# Altium PCB 800U R3N3 IB_LED_V1.0.PcbDoc
Units mm, origin at the board's own origin, x right, y up, seen from the top; angles counter-clockwise.
Board outline 308.48 x 220.22 mm, 4 copper layers (Top Layer, Mid-Layer 2, GND, Bottom Layer); 96 components, 68 nets, 257 pads, 105 vias.
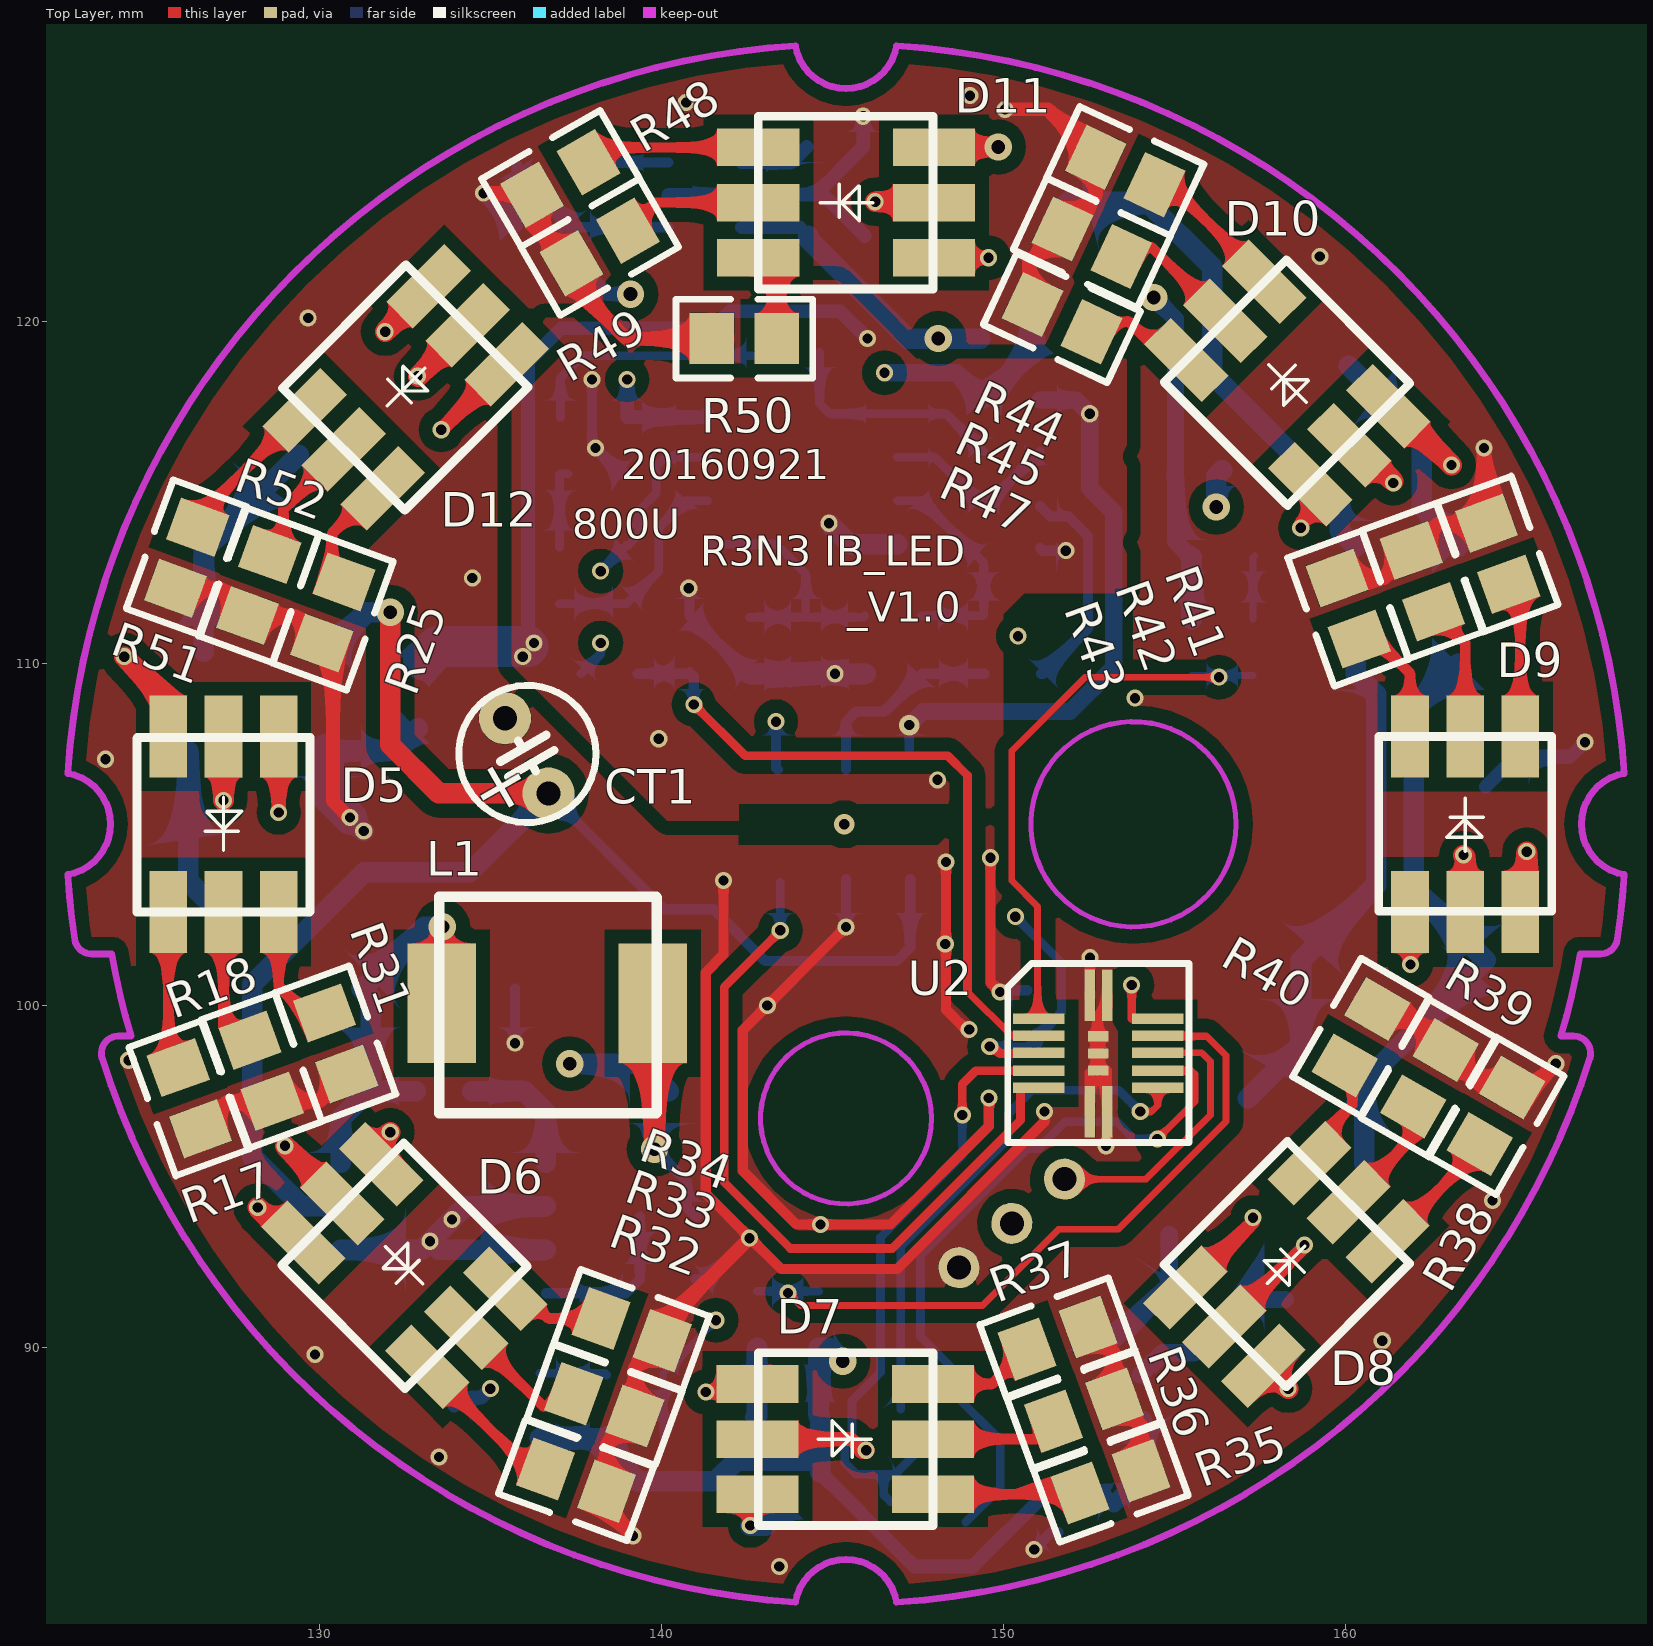
[diagram p0: Top Layer view]
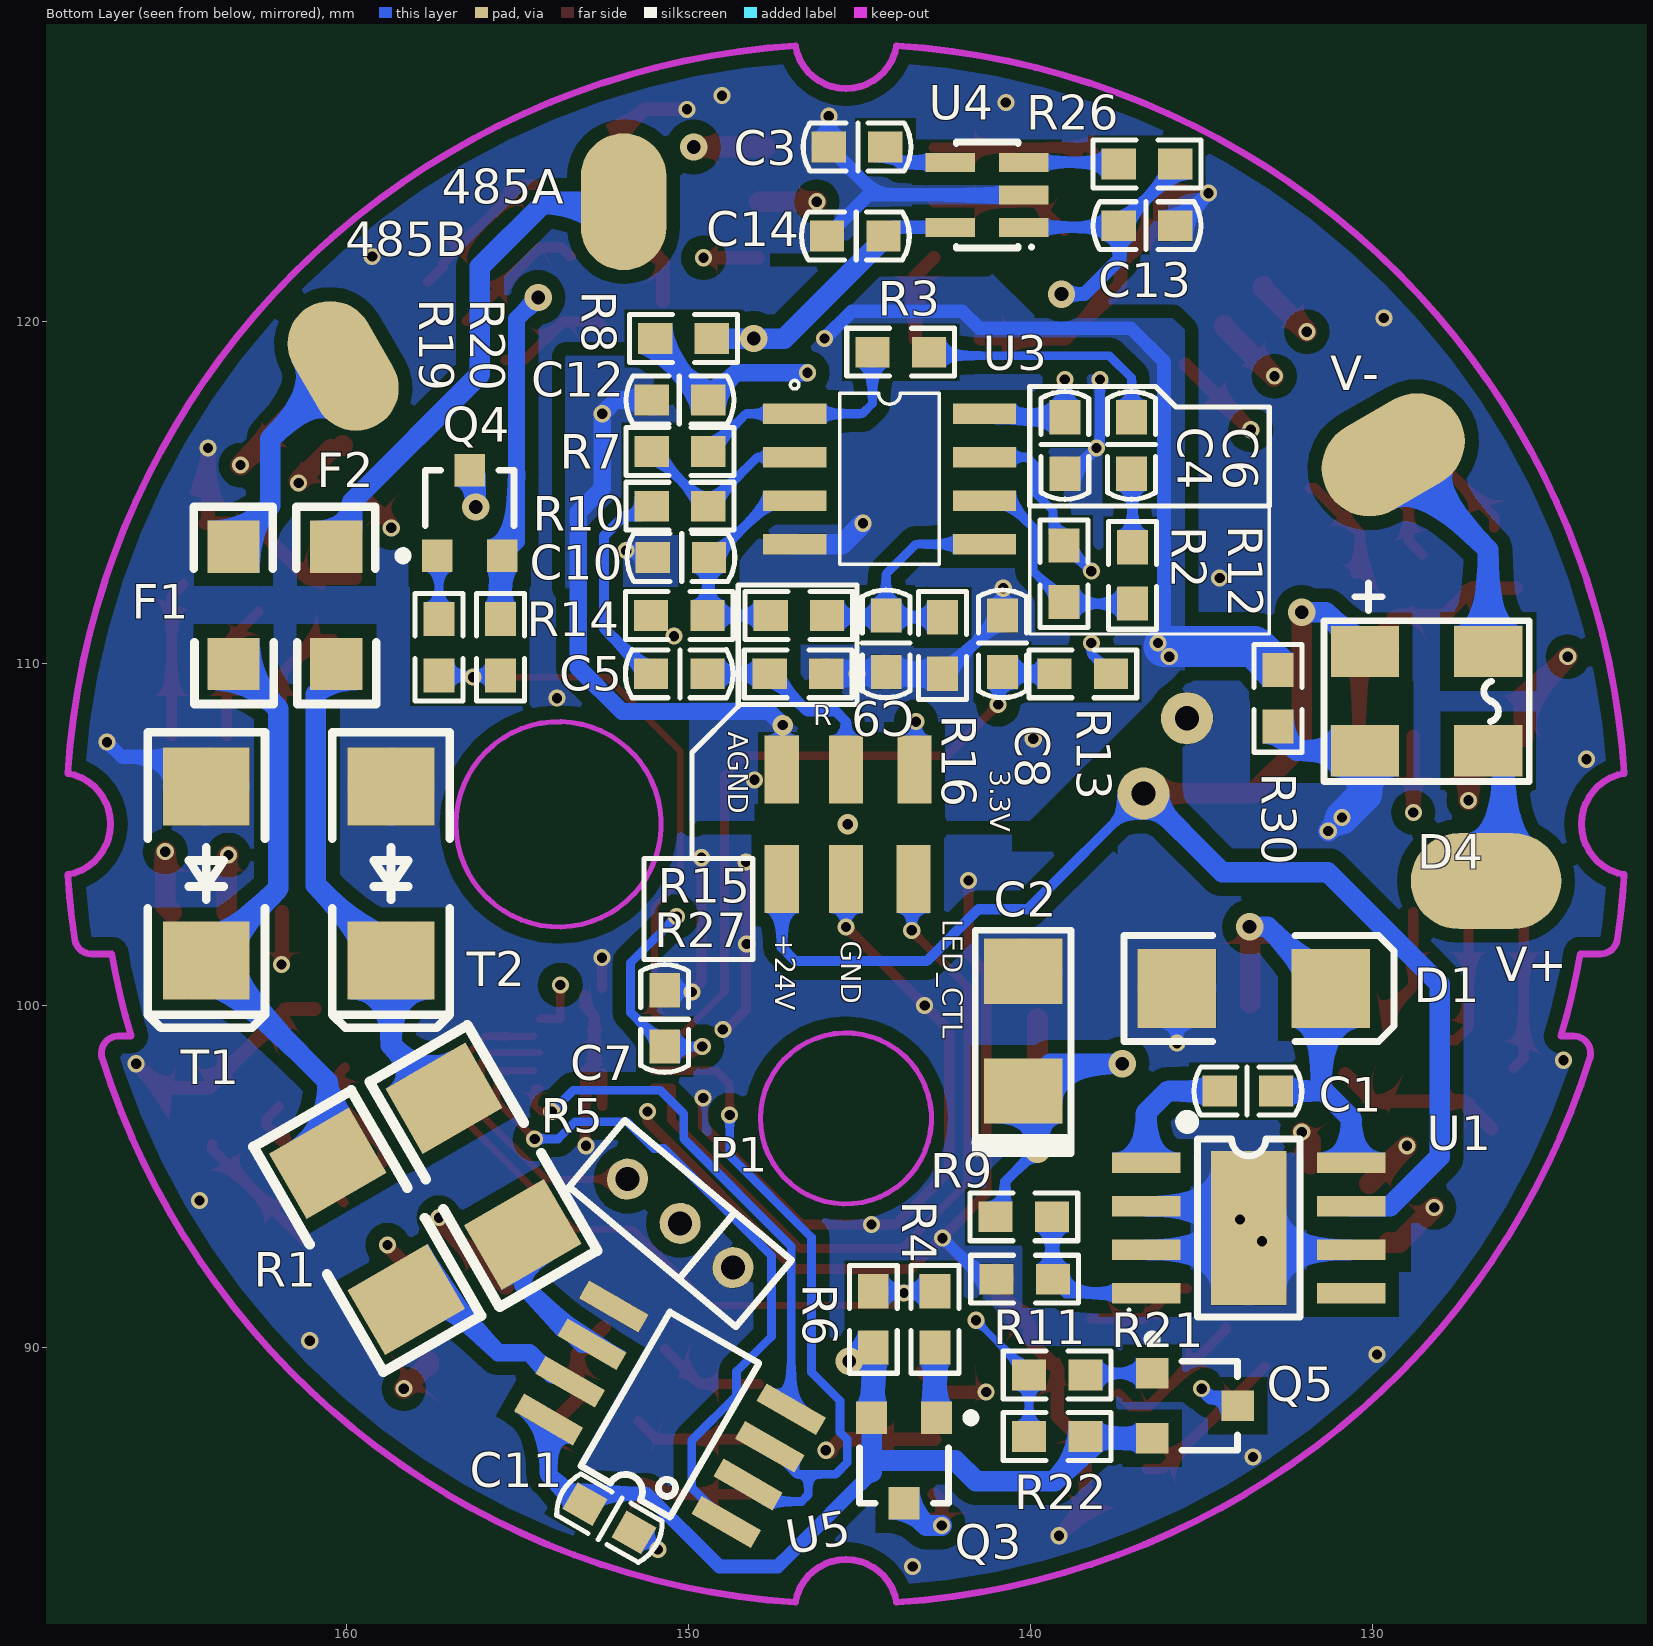
[diagram p1: Bottom Layer view, seen from below]
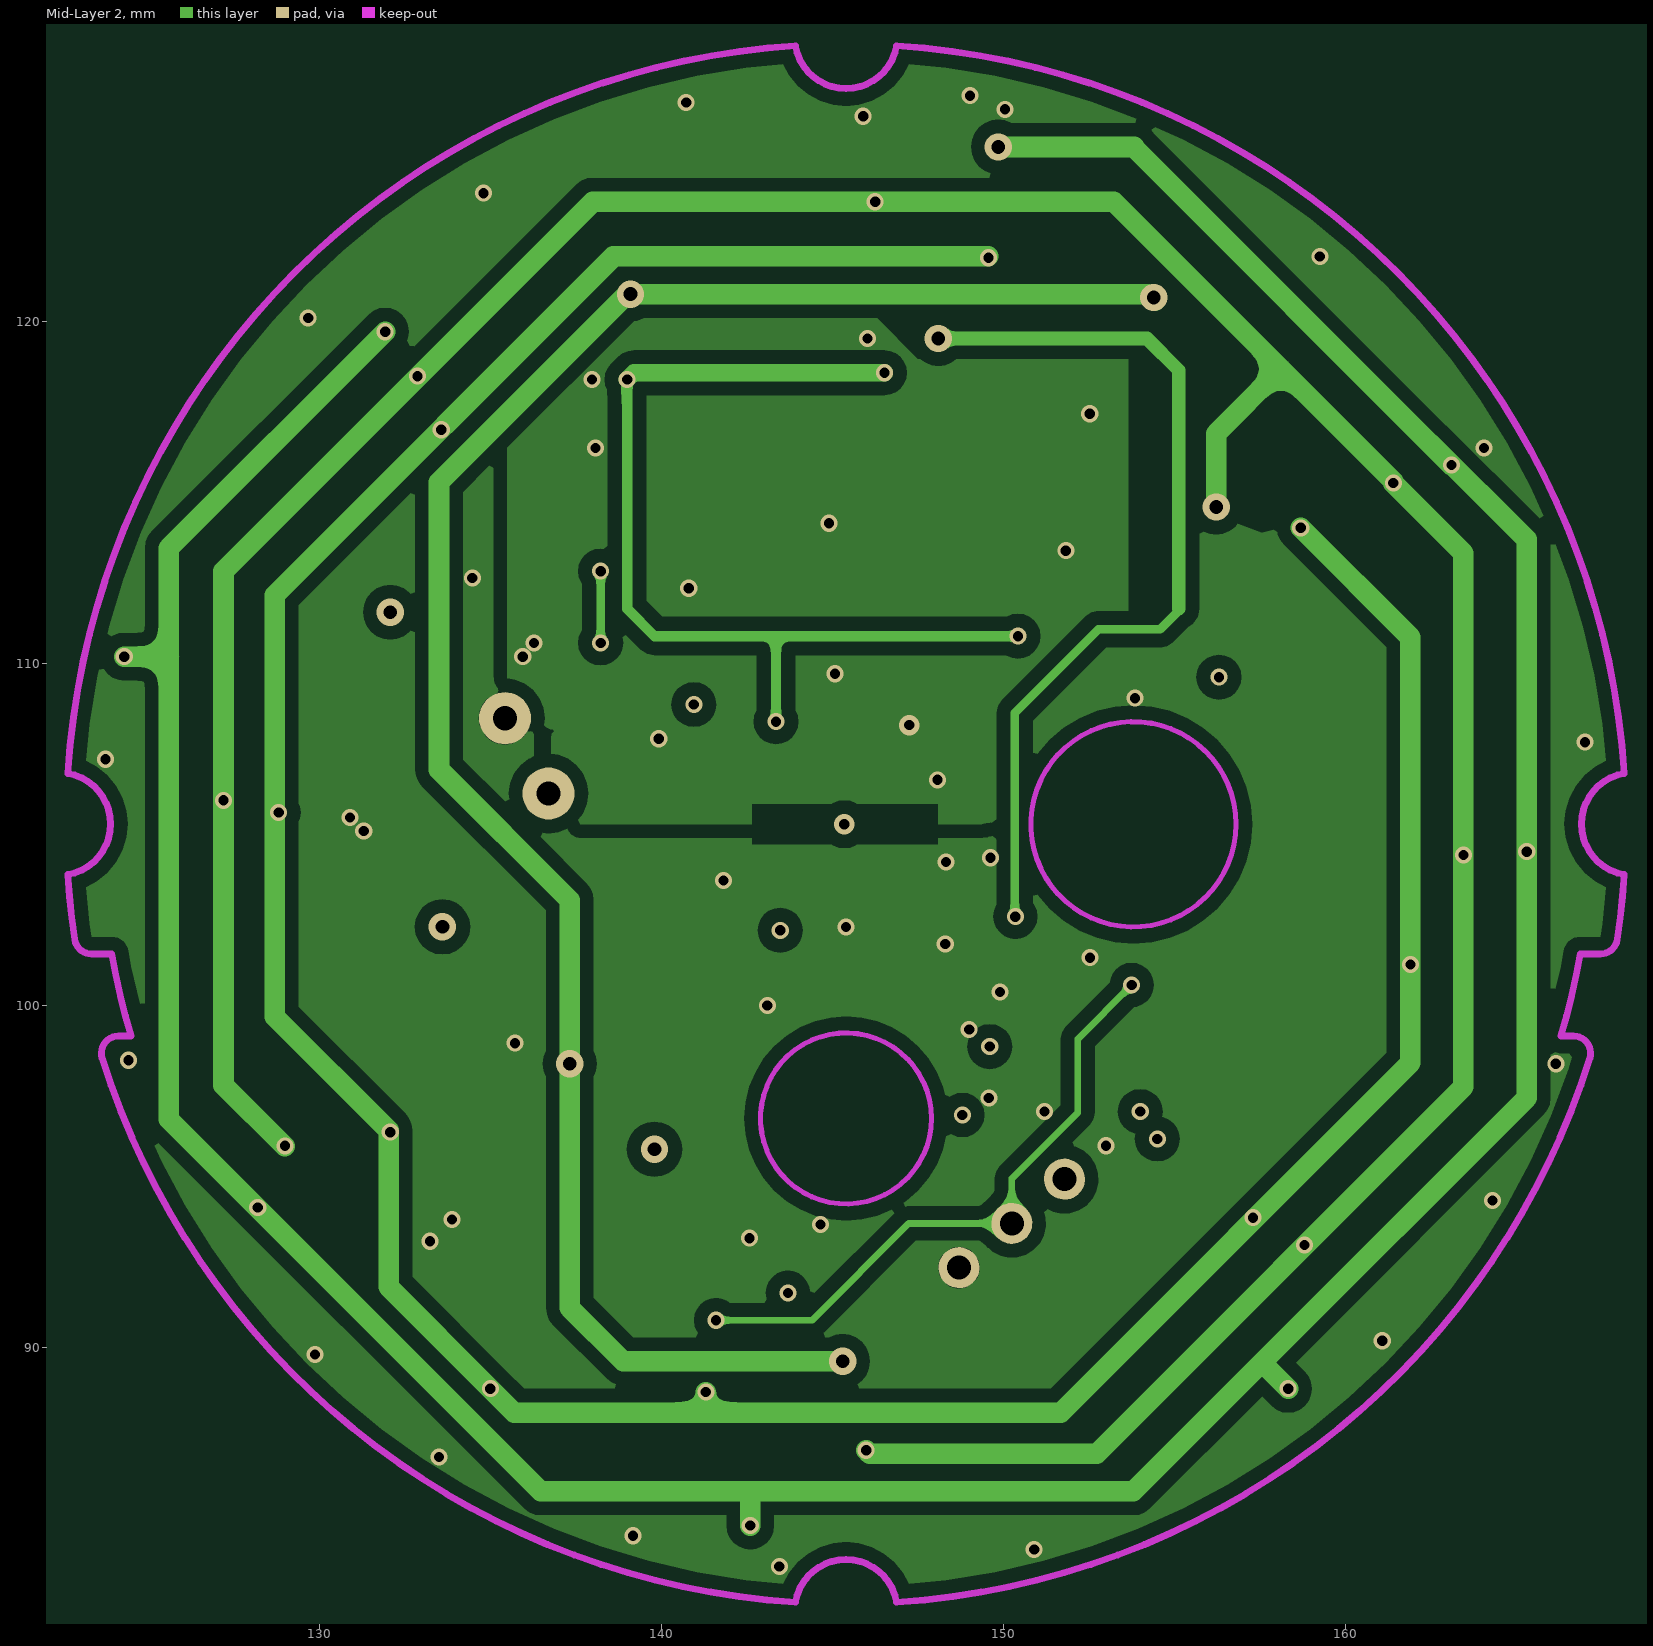
[diagram p2: Mid-Layer 2]
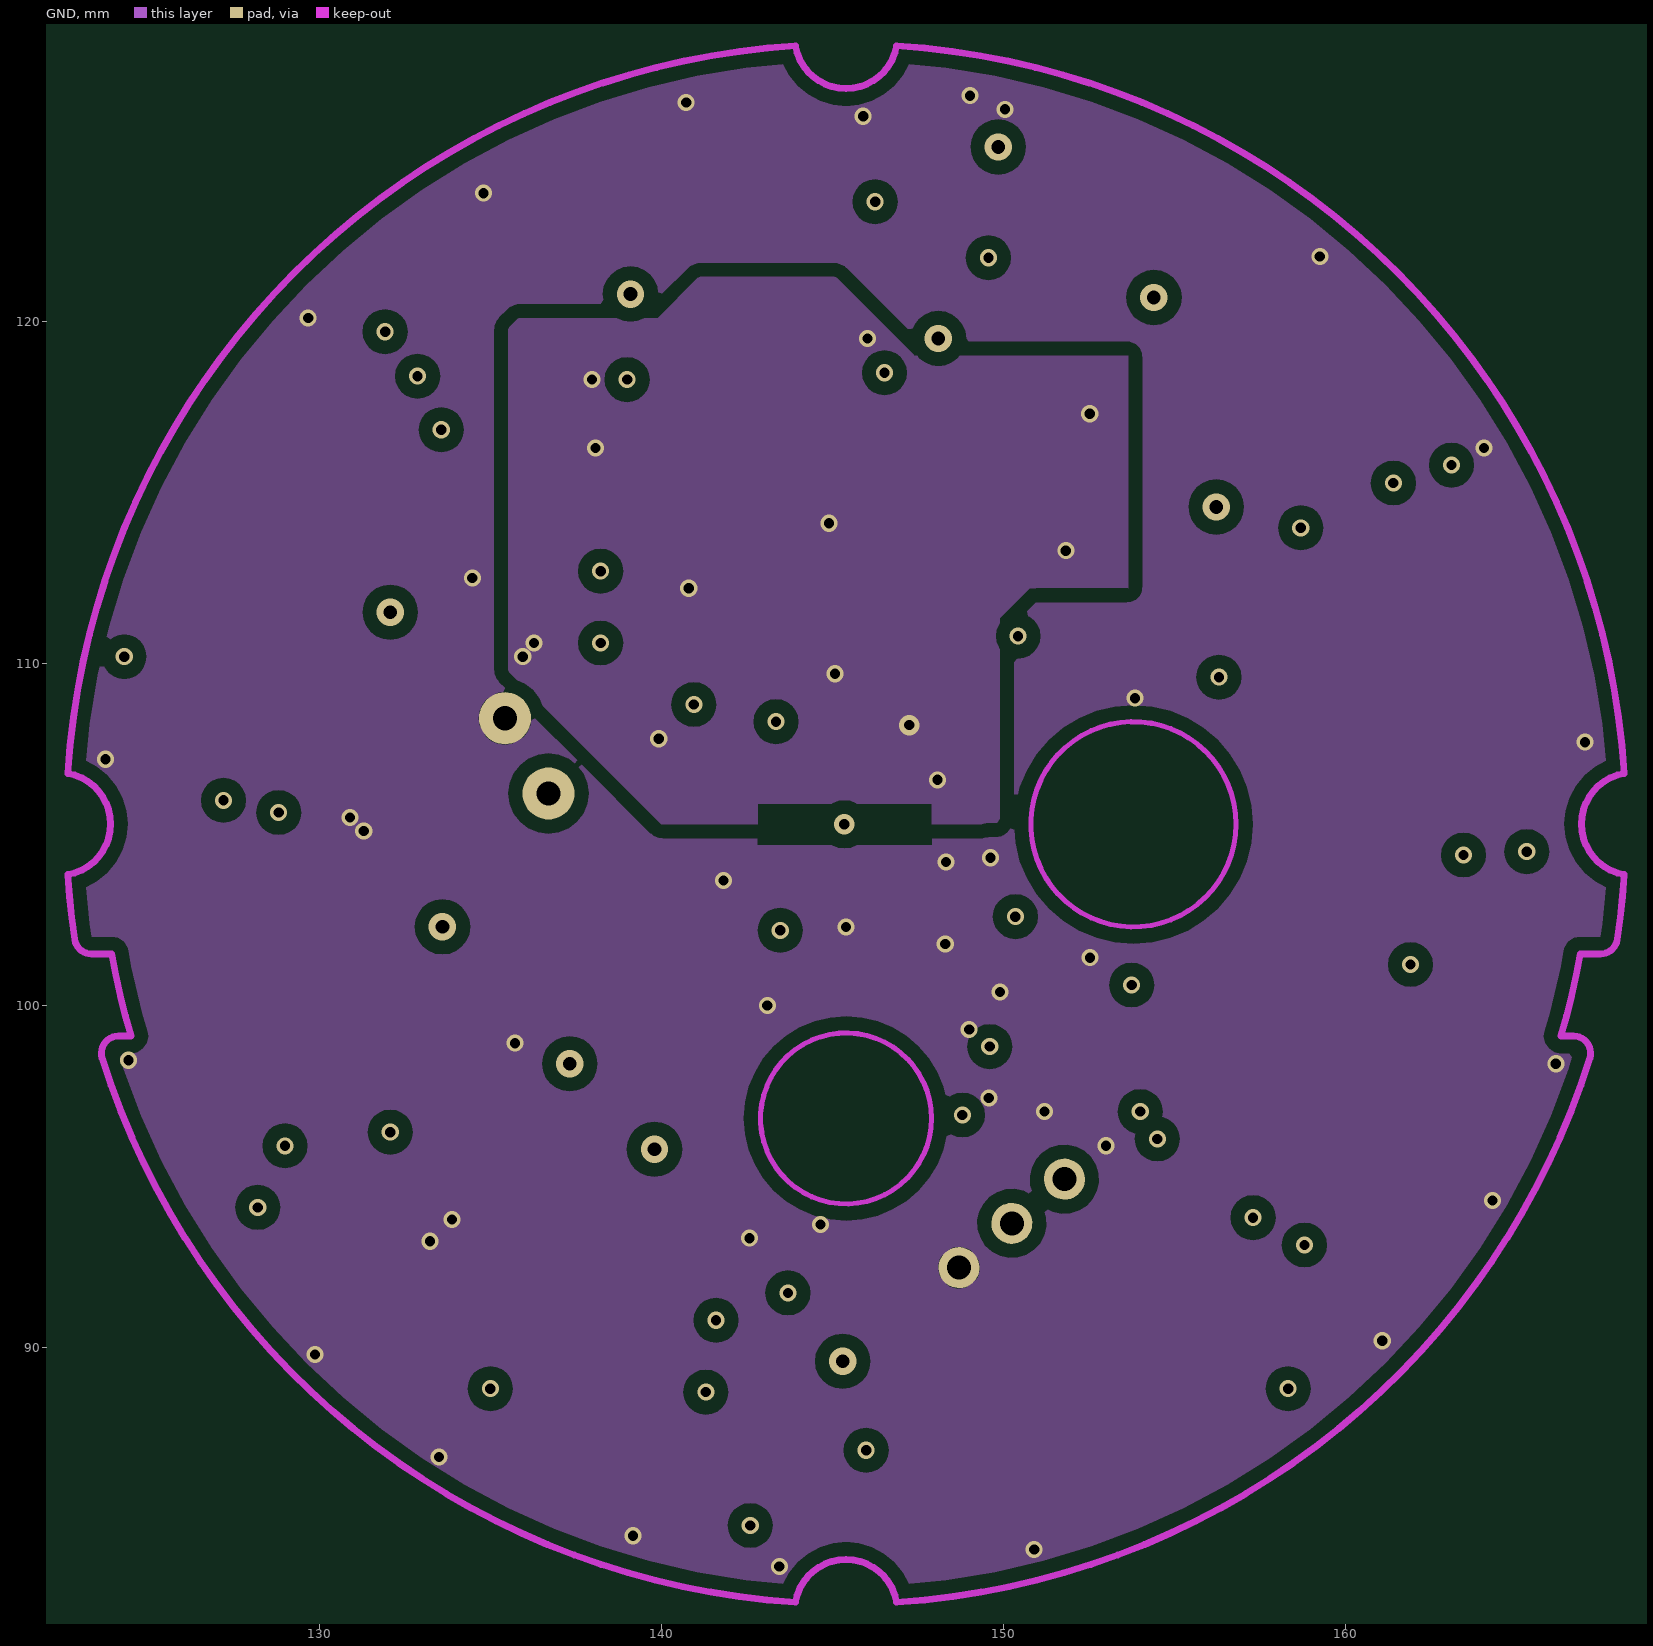
[diagram p3: GND]

## Layer stack, top to bottom
Top Solder: solder mask 0.0102, Solder Resist, Dk 3.5
Top Layer: signal copper 0.0356
Dielectric1: core 0.32, FR-4, Dk 4.8
Mid-Layer 2: signal copper 0.0356
Dielectric3: prepreg 0.32, FR-4, Dk 4.8
GND: signal copper 0.0356
Dielectric2: core 0.32, FR-4, Dk 4.8
Bottom Layer: signal copper 0.0356
Bottom Solder: solder mask 0.0102, Solder Resist, Dk 3.5

## Board outline
-7.366,215.265 301.117,215.265 301.117,-4.191 300.736,-4.572 -6.985,-4.572 -7.366,-4.953

## Design rules (kind name [scope] priority, off if disabled: settings)
Clearance GND [InPolygon] p1: gap=0.4
Clearance Clearance_PAD [ISpad] p2: gap=0.17
Clearance [All] p3: gap=0.25
PolygonConnect [isvia] p1: connectstyle=Direct reliefconductorwidth=0.254 reliefentries=4 polygonreliefangle="90 Angle" airgapwidth=0.254
RoutingVias [All] p1: holewidth=0.3 width=0.5 viastyle="Through Hole" minholewidth=0.3 minwidth=0.5 maxholewidth=0.4 maxwidth=0.8
SilkToSolderMaskClearance SilkscreenOverComponentPads [IsPad] p1: minsilkscreentomaskgap=0.1 clearancetoexposedcopper=TRUE
SolderMaskExpansion [All] p1: expansion=0.102
UnConnectedPin [All] p1:
Width [All] p1: maxlimit=1.5 minlimit=0.2 preferedwidth=0.254 toplayer_maxwidth=0.6 midlayer1_minwidth=0.254 midlayer1_maxwidth=0.254 midlayer2_maxwidth=0.6 midlayer2_prefwidth=0.2 minimp=50.000000 maximp=50.000000 favimp=50.000000
29 further rules are at their usual default settings.

## Components (designator, comment, footprint, x,y, rotation, side; value= is the part's Value field where it differs from the comment)
3.3V "" HOLE_SMD#1 143.4,106.9 r0 bottom locked
485A "焊盘" HOLE_SMD#2 151.9,123.5 r90 bottom
485B "焊盘" HOLE_SMD#2 160.1,118.7 r60 bottom
+24V "" HOLE_SMD#1 147.275,103.7 r180 bottom locked
AGND "" HOLE_SMD#1 147.275,106.9 r180 bottom locked
C1 "10nF" C0603 134.475,97.5 r180 bottom
C2 "33uF/16V" CT3528 140.2,99.2 r90 bottom
C3 "10nF" C0603 144.25,125.1 r0 bottom
C4 "100nF" C0603 139,117.2 r270 bottom
C5 "1nF" C0603 149.45,109.7 r0 bottom
C6 "1nF" C0603 137.05,117.2 r270 bottom
C7 "1uF" C0603 150.7,98.8 r90 bottom
C8 "1nF" C0603 140.825,111.4 r270 bottom
C9 "100nF" C0603 144.225,111.4 r270 bottom
C10 "100nF" C0603 149.4,113.1 r0 bottom
C11 "100nF" C0603 151.6,84.6 r30 bottom
C12 "100nF" C0603 151.075,117.7 r180 bottom
C13 "4.7uF" C0603 137.425,122.8 r180 bottom
C14 "4.7uF" C0603 144.3,122.5 r0 bottom
CT1 "22uF/50V" RB0.1 136.7,106.2 r120 top
D1 "SS14" SMB 133.475,100.5 r180 bottom (schematic designator D4)
D4 "LX10M" "桥堆 3.8*3.5" 128.425,108.9 r90 bottom
D5 "5050RGB" 5050RGB 127.2,105.3 r90 top locked
D6 "5050RGB" 5050RGB 132.481,92.4 r135 top locked
D7 "5050RGB" 5050RGB 145.375,87.325 r180 top locked
D8 "5050RGB" 5050RGB 158.275,92.431 r225 top locked
D9 "5050RGB" 5050RGB 163.5,105.3 r270 top locked
D10 "5050RGB" 5050RGB 158.3,118.2 r315 top locked
D11 "5050RGB" 5050RGB 145.4,123.475 r0 top locked
D12 "5050RGB" 5050RGB 132.525,118.075 r45 top locked
F1 "FSMD012-1206-R" 1206 163.3,111.7 r90 bottom
F2 "FSMD012-1206-R" 1206 160.3,111.7 r90 bottom
GND "" HOLE_SMD#3 145.4,103.7 r180 top locked (schematic designator GND1)
L1 "68uH" L-6X6 133.175,100.1 r0 top
LED_CTL "" HOLE_SMD#1 143.425,103.7 r180 bottom locked
P1 "3P 2.0mm" SIP3 148.3,92 r130 bottom
Q3 "Si2301CDS" SOT-23 143.7,86.7 r0 bottom (schematic designator Q6)
Q4 "Si2301CDS" SOT-23 156.4,114.4 r180 bottom
Q5 "Si2301CDS" SOT-23 135.2,88.3 r270 bottom
R "" HOLE_SMD#1 145.4,106.9 r180 bottom locked (schematic designator LED_R)
R1 "20R" 2010 159.4,93.4 r240 bottom
R2 "100K" R0603 139.025,111.8 r90 bottom
R3 "0R" R0603 144.625,119.1 r180 bottom
R4 "1K" R0603 142.8,90 r90 bottom
R5 "20R" 2010 156,95.3 r240 bottom
R6 "10K" R0603 144.6,90 r90 bottom
R7 "200K" R0603 151.075,116.2 r180 bottom
R8 "0R" R0603 149.325,119.5 r0 bottom
R9 "4.75K/1%" R0603 139.375,93.825 r0 bottom
R10 "12K" R0603 151.075,114.6 r180 bottom
R11 "1.62K/1%" R0603 141,92 r180 bottom
R12 "10K" R0603 137.025,113.4 r270 bottom
R13 "0R" R0603 137.65,109.7 r0 bottom
R14 "5.1K" R0603 151.1,111.4 r180 bottom
R15 "2K" R0603 147.6,111.4 r180 bottom
R16 "5.1K" R0603 142.575,109.7 r90 bottom
R17 "200R" 0805 126.525,96.4 r110 top
R18 "150R" 0805 128.625,97.2 r110 top
R19 "1K" R0603 157.3,111.3 r270 bottom
R20 "10K" R0603 155.5,111.3 r270 bottom
R21 "1K" R0603 138.4,89.2 r0 bottom
R22 "10K" R0603 138.4,87.4 r0 bottom
R25 "150R" 0805 130.075,110.6 r70 top
R26 "10K" R0603 135.775,124.6 r0 bottom
R27 "10K" R0603 147.625,109.7 r180 bottom
R30 "0R" R0603 132.769,108.156 r90 bottom
R31 "150R" 0805 130.8,98 r110 top
R32 "200R" 0805 138.4,85.8 r160 top
R33 "150R" 0805 139.225,88 r160 top
R34 "150R" 0805 140.025,90.2 r160 top
R35 "200R" 0805 154.025,86.4 r200 top
R36 "150R" 0805 153.25,88.5 r200 top
R37 "150R" 0805 152.475,90.6 r200 top
R38 "200R" 0805 164.875,97.6 r240 top
R39 "150R" 0805 162.925,98.7 r240 top
R40 "150R" 0805 160.925,99.9 r240 top
R41 "200R" 0805 164.125,114.1 r290 top
R42 "150R" 0805 161.925,113.3 r290 top
R43 "150R" 0805 159.75,112.5 r290 top
R44 "200R" 0805 152.7,124.8 r335 top
R45 "150R" 0805 151.725,122.7 r335 top
R47 "150R" 0805 150.85,120.5 r335 top
R48 "200R" 0805 136.225,123.7 r30 top
R49 "150R" 0805 137.375,121.7 r30 top
R50 "150R" 0805 141.475,119.5 r0 top
R51 "200R" 0805 125.8,112.2 r70 top
R52 "150R" 0805 127.9,111.4 r70 top
T1 "" HSMA 164.1,106.4 r270 bottom
T2 "" HSMA 158.7,106.4 r270 bottom
U1 "L22674" SO-1.27-9/4.0 136.625,95.4 r270 bottom locked
U2 "C8051F300" QFN-11 152.775,98.6 r0 top locked
U3 "TP2312-SR" SO-8 146.9,117.3 r90 bottom locked (schematic designator U5)
U4 "SP6205" SOT-23-5 141.275,123.7 r180 bottom
U5 "MAX3085" SO-1.27-8/4.0 148.9,84.9 r120 bottom
V+ "" HOLE_SMD#4 126.688,103.639 r225 bottom
V- "" HOLE_SMD#5 129.4,116.1 r330 bottom

## Footprints (in the part's own frame and the unit in brackets; to place one, negate y for a bottom-side part, rotate by r counter-clockwise, add the part's x,y. Pads: shape width x height; smd on the part's side, far side on the other; paste and mask are expansions set on the pad)
0805 [mm] "Thermistor; 2 Leads"
  rect 1.3x1.5 smd: 1(0,0) 2(1.9,0)
  silkscreen extent -1.05,-1.15 2.95,1.15
1206 [mil]
  rect 60x60 smd: 1(-67.5,0) 2(67.5,0)
  silkscreen extent -114,-46 114,46
2010 [mm]
  rect 2.2x2.7 smd: 1(-2.3,0) 2(2.3,0)
  silkscreen extent -3.8,-1.64 3.8,1.66
5050RGB [mm]
  rect 2.4x1.1 smd: 1(-2.565,1.613) 2(-2.565,0) 3(-2.565,-1.613) 4(2.565,-1.613) 5(2.565,0) 6(2.565,1.613)
  silkscreen extent -2.56,-2.53 2.54,2.53
C0603 [mm]
  rect 1x0.9 smd: 1(0,0) 2(1.65,0)
  silkscreen extent -0.75,-0.7 2.4,0.7
CT3528 [mil]
  rect 75x90 smd: 1(-66.85,0.75) 2(70.94,0.75)
  silkscreen extent -139,-54 118,56
HOLE_SMD#1 [mm]
  rect 1x2 smd: 1(0,0)
HOLE_SMD#2 [mm]
  oval 4x2.5 smd: 1(0,0)
HOLE_SMD#3 [mm]
  rect 1x2 smd far side: 1(0,0)
HOLE_SMD#4 [mm]
  oval 4.4x2.8 smd rot 45: 1(0,0)
HOLE_SMD#5 [mm]
  oval 4.4x2.8 smd: 1(0,0)
HSMA [mil]
  rect 90x100 smd: 1(0,0) 2(200,0)
  silkscreen extent -63,-68 278,68
L-6X6 [mm]
  rect 2x3.5 smd: 1(0.403,-0.033) 2(6.571,-0.033)
  silkscreen extent 0.33,-3.25 6.69,3.08
QFN-11 [mm]
  rect 1.5x0.305 smd: 1(-1.737,1.018) 2(-1.737,0.518) 3(-1.737,0.018) 4(-1.737,-0.507) 5(-1.737,-1.007) 6(1.737,-1.007) 7(1.737,-0.507) 8(1.737,0.018) 9(1.737,0.518) 10(1.737,1.018)
  rect 0.305x1.5 smd: 11(-0.248,-1.705) 11(-0.248,1.705) 11(0.26,-1.705) 11(0.26,1.705)
  rect 0.6x0.3 smd: 11(0,-0.5) 11(0,0) 11(0,0.5)
  silkscreen extent -2.65,-2.6 2.65,2.63
R0603 [mm]
  rect 1x0.9 smd: 1(0,0) 2(1.65,0)
  silkscreen extent -0.75,-0.7 2.4,0.7
RB0.1 [mil]
  round 60 hole 28: 1(0,0) 2(100,0)
  silkscreen extent -27,-81 131,77
SIP3 [mm]
  round 1.2 hole 0.7: 1(0,0.525) 2(0,2.54) 3(0,4.55)
  silkscreen extent -1.28,-0.65 1.27,5.72
SMB [mm] "DO-214-AA/SMB; 2 C-Bend Leads; Body 5.3 x 3.6 mm, inc. leads (LxW)"
  rect 2.3x2.3 smd: 1(-2.25,0) 2(2.25,0)
  silkscreen extent -3.8,-1.55 4.1,1.55
SO-1.27-8/4.0 [mm]
  rect 0.6x2 smd: 1(0,0) 2(1.27,0) 3(2.54,0) 4(3.81,0) 5(3.81,6) 6(2.54,6) 7(1.27,6) 8(0,6)
  silkscreen extent -0.7,1.5 4.5,4.5
SO-1.27-9/4.0 [mm]
  rect 0.6x2 smd: 1(0,0) 2(1.27,0) 3(2.54,0) 4(3.81,0) 5(3.81,6) 6(2.54,6) 7(1.27,6) 8(0,6)
  rect 4.5x2.2 smd: 9(1.905,3)
  silkscreen extent -1.35,1.05 4.5,4.5
SO-8 [mm]
  rect 0.6x1.85 smd: 1(0,0) 2(-1.27,0) 3(-2.54,0) 4(-3.81,0) 5(-3.81,-5.55) 6(-2.54,-5.55) 7(-1.27,-5.55) 8(0,-5.55)
  silkscreen extent -4.41,-4.23 0.97,0.13
SOT-23 [mm] "SOT-23; 3 Leads; Body 3.0 x 2.6 mm, inc. l"
  rect 0.9x0.95 smd: 1(-0.95,-1.25) 2(0.95,-1.25) 3(0,1.25)
  silkscreen extent -2.07,-1.37 1.3,1.25
SOT-23-5 [mm]
  rect 1.45x0.55 smd: 1(1.075,-0.95) 2(1.075,0) 3(1.075,0.95) 4(-1.075,0.95) 5(-1.075,-0.95)
  silkscreen extent -0.9,-1.57 1.35,1.55
"桥堆 3.8*3.5" [mm]
  rect 1.5x2 smd: 1(1.45,1.8) 2(1.45,-1.8) 3(-1.45,-1.8) 4(-1.45,1.8)
  silkscreen extent -2.35,-3 3.45,3

## Part data
3.3V +24V AGND GND LED_CTL R V+ V-: library part 焊盘
C1 C4 C5 C6 C8 C9 C10: library part Cap, "Capacitor"
C2 CT1: library part "Cap Pol1", "Polarized Capacitor (Radial)"
C3 C12 C13 C14: library part CAP, "Capacitor"
C7: library part Cap, "贴片电容"
C11: library part Cap, "贴片陶瓷电容"
D1: library part SMBJ6.0CA
D4: library part Bridge2, "贴片桥堆"
D5 D6 D7 D8 D9 D10 D11 D12: "RBG发光管"
F1 F2: library part "Fuse 2", "可恢复保险丝"
L1: library part 电感
P1: library part MHDR1X3, "插座"
Q3 Q4 Q5: library part P-MOSFET, "贴片MOS管"
R1 R4 R5 R6 R17 R18 R19 R20 R21 R22 R25 R31 R32 R33 R34 R35 R36 R37 R38 R39 R40 R41 R42 R43 R44 R45 R47 R48 R49 R50 R51 R52: library part "Res Semi", "贴片电阻"
R2 R3 R7 R9 R10 R11 R12 R13 R14 R15 R16 R27 R30: library part "Res Semi", "Semiconductor Resistor"
R8 R26: library part Res1, "Resistor"
T1 T2: library part SMBJ6.0CA, "TVS管"
U1: library part 2674
U2: library part PIC16C505, "贴片芯片"
U3: library part LM833D, "Dual Low Noise, Audio Amplifier"
U4: library part SP6203/SP6205
U5: library part MAX_485, "贴片芯片"

## Via types
v1: diameter 0.5, hole 0.3, Top Layer to Bottom Layer, 93 vias
v2: diameter 0.8, hole 0.4, Top Layer to Bottom Layer, 10 vias
v3: diameter 0.6, hole 0.3, Top Layer to Bottom Layer, 2 vias

## Nets (pads, with @x,y where several pads share a name; then routed paths per layer and width w, separated by ;. In a path a pad name is that pad's centre, name@x,y a point inside that pad or via, vN(x,y) a via of type N, cw(c..) or ccw(c..) an arc to the next point about the centre after c; other vN are vias at no path point)
3.3V: C7.1 C14.1 R8.1 U2.3 U4.5 | length 42.2
  Top Layer w0.254: v1(149.6,98.8) 149.7,98.8 149.9,98.6 U2.3@150.894,98.6
  Mid-Layer 2 w0.254: v1(150.35,102.6) 150.331,102.619 150.331,108.556 152.779,111.004 154.586,111.004 155.125,111.542 155.125,111.6
  Mid-Layer 2 w0.4: v2(148.1,119.5) 154.2,119.5 155.125,118.575 155.125,115.448 155.125,111.6
  Bottom Layer w0.254: C14.1@144.05,122.75 C14.1 ; v1@149.5,98.9 v1(149.6,98.8) C7.1 151.7,99.8 151.7,101.25 v1(150.35,102.6)
  Bottom Layer w0.4: U4.5 C14.1@144.05,122.75
  Bottom Layer w0.6: C14.1 144.3,122.407 147.207,119.5 R8.1
+24V: +24V.1 CT1.1 D4.1 U1.7 | length 45.4
  Top Layer w0.6: v2(132.075,111.5) 132.075,107.625 133.5,106.2 CT1.1
  Bottom Layer w0.3: CT1.1 140.085,102.815 141.528,102.815 143.044,101.3 146.875,101.3 147.275,101.7 +24V.1
  Bottom Layer w0.6: D4.1 131.375,111.5 v2(132.075,111.5) ; U1.7 129.495,94.13 128.038,95.587 128.038,100.625 131.313,103.9 134.4,103.9 CT1.1
A3.3V: 3.3V.1 C4.1 C12.2 R8.2 R14.1 U3.8 | length 39.1
  Mid-Layer 2 w0.3: v1(139,118.3) 139,111.6 139.8,110.8 143.35,110.8 ; v1(143.35,108.3) 143.35,110.8 ; v1(150.425,110.8) 143.35,110.8
  Mid-Layer 2 w0.5: v1(139,118.3) 139.2,118.5 v1(146.525,118.5)
  Bottom Layer w0.3: v1(143.35,108.3) 143.35,106.95 3.3V.1
  Bottom Layer w0.4: v1(139,118.3) C4.1 141.25,117.2 U3.8
  Bottom Layer w0.5: v1(146.525,118.5) 148.625,118.5 C12.2 150.975,119.25 R8.2
ADCIN1: C8.2 R13.2 U2.2 | length 20
  Top Layer w0.2: 148.95,100.4 150.232,99.118 U2.2@150.863,99.118
  Top Layer w0.254: v1(140.95,108.8) 142.45,107.3 148.375,107.3 148.95,106.725 148.95,100.4
  Bottom Layer w0.3: R13.2 140.775,109.7 C8.2 ; v1(140.95,108.8) C8.2@140.95,109.625
AGND: AGND.1 C4.2 C8.1 C9.2 C10.2 C12.1 R16.1 R27.2 R30.2 U3.4 | length 52.2
  Bottom Layer w0.254: AGND.1@147.25,107.4 v3@147.25,108.3
  Bottom Layer w0.3: v1(137.975,118.3) 137.975,116.4 v1(138.075,116.3) 138.825,115.55 C4.2 ; v1(140.8,112.2) 140.825,112.175 C8.1 142.525,109.7 R16.1 ; C10.2@151.075,113.375 151.15,113.3 v1(151.825,113.3)
  Bottom Layer w0.4: v1@136.1,110.5 136.1,118.825 137.075,119.8 141.5,119.8 142,120.3 145.225,120.3 v1(146.025,119.5)
  Bottom Layer w0.5: v3(147.25,108.2) 147.65,108.6 151.95,108.6 153.225,109.875 153.225,114.425 152.525,115.125 v1(152.525,117.3) 152.125,117.7 C12.1
  Bottom Layer w0.6: R16.1 R27.2 ; v1@144.95,114.05 145.51,113.49 U3.4
  Bottom Layer w1.2: R30.2@133.054,110.104 133.45,110.5 v1@136.1,110.5
  other v1: 148.075,106.6 139.925,107.8 145.075,109.7 135.95,110.2 136.275,110.6 144.9,114.1
BLUE: D5.4 D6.4 D7.4 D8.4 D9.4 D10.4 D11.4 D12.4 Q5.3 | length 117
  Top Layer w0.4: v1(128.813,105.643) D5.4 D5.4@128.813,107.162 ; v1(133.565,116.835) D12.4 ; v1(141.3,88.7) 142.572,88.7 D7.4 D7.4@143.172,89.3 ; D11.4 v1(149.562,121.862) ; D8.4 155.383,91.758 157.3,93.675 v1(157.3,93.8) ; v1(158.694,113.966) 158.694,114.086 D10.4@159.382,114.773 ; D9.4 161.887,101.213 v1(161.9,101.2)
  Top Layer w0.6: D6.4 131.808,96.033 v1(132.075,96.3)
  Mid-Layer 2 w0.6: v1(141.3,88.7) 141.3,88.1 ; v1@149.562,121.9 138.6,121.9 128.7,112 128.7,99.675 132.025,96.35 132.025,91.775 v1(135,88.8) 135.7,88.1 141.3,88.1 ; v1(158.694,113.966) 161.9,110.761 v1(161.9,101.2) 161.9,98.325 151.675,88.1 141.3,88.1
  Bottom Layer w0.4: Q5.3 134.188,88.538 134.738,88.538 v1(135,88.8)
GND: C2.2 C3.2 C7.2 C11.1 C13.2 C14.2 CT1.2 D1.1 D4.4 GND.1 P1.1 R11.1 R17.1 R18.1 R25.1 R30.1 R31.1 R32.1 R33.1 R34.1 R35.1 R36.1 R37.1 R38.1 R39.1 R40.1 R41.1 R42.1 R43.1 R44.1 R45.1 R47.1 R48.1 R49.1 R50.1 R51.1 R52.1 T1.1 T2.1 U1.2 U1.3 U1.6 U1.9 U2.11 U4.2 U5.5 | length 154.8
  Top Layer w0.3: v1(141.816,103.655) 141.816,101.486 141.295,100.965 141.295,94.505 142.587,93.212 143.5,92.3 146.9,92.3 151.2,96.6 v1(151.2,96.9) ; v1(145.4,102.3) 142.377,99.277 142.377,95.173 143.95,93.6 146.7,93.6 149.575,96.475 v1(149.575,97.3) ; v1(148.321,104.2) 148.321,102.722 148.325,102.718 148.325,99.875 148.9,99.3 v1(149,99.3) ; v1(149.624,104.32) 149.624,100.676 v1(149.9,100.4) ; U2.11@152.525,97.067 U2.11@152.525,98.025 ; U2.11@152.531,100.521 v1(152.531,101.401) ; U2.11@152.75,98.1 152.75,99.675 153.036,99.961 U2.11@153.036,100.305 ; v1(153,95.9) 153.025,95.875 U2.11@153.025,98.1
  Top Layer w0.4: R51.1 127.1,112.2 R52.1 129.275,111.4 R25.1 130.4,110.275 130.4,105.975 v1@130.887,105.488 ; R17.1 127.325,97.2 R18.1 130,97.2 R31.1 ; v1(134.8,123.75) 136.175,123.75 R48.1 136.225,122.85 R49.1 137.375,121.1 138.975,119.5 R50.1 ; v1(139.175,84.5) 138.4,85.275 R32.1 138.4,87.175 R33.1 139.225,89.4 R34.1 140.025,90.65 v1(142.575,93.2) v1@142.587,93.212 ; v1(150.05,126.2) 151.3,126.2 R44.1 152.7,123.675 R45.1 150.75,121.725 R47.1@150.75,120.6 ; R37.1 153.25,89.825 R36.1 154.025,87.725 R35.1 ; R43.1 161.125,112.5 R42.1 162.725,114.1 R41.1 164.05,114.175 v1(164.05,116.3) ; R40.1 161.725,99.9 R39.1 164.025,97.6 R38.1 165.45,97.6 v1(166.15,98.3)
  Bottom Layer w0.3: v1(135.725,98.9) D1.1 ; R11.1 141.375,92 v1(142.575,93.2) ; v1(145.4,102.3) GND.1 ; v1(149.9,100.4) 149.95,100.45 C7.2 ; v1(150.9,84.1) 151.4,84.6 C11.1
  Bottom Layer w0.4: v1(134.8,123.75) C13.2@135.75,122.8 ; U4.2 144.5,123.7 ; v1(145.9,126) C3.2 144.5,123.7 ; C14.2 144.75,123.7 144.5,123.7 ; T1.1 164.972,107.272 166.572,107.272 v1(167,107.7)
  Bottom Layer w0.6: D4.4 132.225,107.45 R30.1@132.875,108.1 ; U1.6 132.99,92.86 v1(133.24,93.11) ; v1(130.9,105.5) v1(131.3,105.1) ; U1.3 133.49,92.86 v1(133.24,93.11) ; U1.2 134.26,94.13 v1(133.878,93.748) U1.9 v1(133.24,93.11)
  Bottom Layer w1: D4.4 130.225,106.175 v1(130.9,105.5)
  other v1: 143.45,83.6 133.5,86.8 129.875,89.8 161.075,90.2 144.65,93.6 164.3,94.3 124.425,98.4 143.1,100 148.3,101.8 123.75,107.2 153.844,108.987 134.475,112.5 129.675,120.1 159.25,121.9 140.725,126.4 149.025,126.6
GREEN: D5.5 D6.5 D7.5 D8.5 D9.5 D10.5 D11.5 D12.5 Q4.3 | length 123
  Top Layer w0.4: D7.5 145.55,87.325 v1@145.875,87 ; D8.5 158.8,92.956 v1(158.8,93)
  Top Layer w0.5: v1@145.875,87 v1(145.987,87)
  Top Layer w0.6: v1(127.2,106) D5.5 ; v1(129,95.9) D6.5@130.108,94.792 ; v1@132.888,118.388 134.339,119.839 D12.5 ; v1(146.25,123.5) D11.5@147.94,123.5 ; D10.5@160.114,116.361 D10.5 ; D10.5@160.464,116.261 v1@161.4,115.325 ; v1(163.45,104.4) 163.5,104.35 D9.5
  Mid-Layer 2 w0.6: 127.2,97.675 v1@128.987,95.887 ; 127.2,97.681 v1(127.2,106) 127.2,112.7 138,123.5 v1(146.25,123.5) 153.225,123.5 158.113,118.613 ; v1(145.987,87) 146.087,86.9 152.725,86.9 163.45,97.625 v1(163.45,104.4) 163.45,113.225 v1(161.4,115.275) 161.4,115.325 158.113,118.613 ; v2(156.222,114.575) 156.222,116.722 158.113,118.613
  Bottom Layer w0.6: v2(156.222,114.575) 156.222,115.473 Q4.3
  other v1: 132.875,118.4
LED_B: P1.2 R21.2 R22.2 U2.10 | length 23.8
  Top Layer w0.254: v1(153.75,100.6) 153.75,99.618 U2.10@154.337,99.618
  Mid-Layer 2 w0.2: v1(141.6,90.8) 144.4,90.8 147.233,93.633 P1.2 150.246,94.946 152.175,96.875 152.175,99.025 v1(153.75,100.6)
  Bottom Layer w0.2: R22.2 R21.2 140.05,89.25 v1(141.6,90.8)
LED_G: R19.2 R20.2 U2.1 | length 16.9
  Top Layer w0.2: U2.1@150.863,99.618 151,99.756 151,102.9 150.244,103.656 150.244,107.444 152.4,109.6 v1(156.3,109.6)
  Bottom Layer w0.2: R20.2 R19.2
LED_R: R4.2 R6.2 U2.9 | length 21.2
  Top Layer w0.2: v1(143.7,91.6) 144.064,91.236 149.389,91.236 151.612,93.459 153.351,93.459 156.509,96.618 156.509,98.546 155.955,99.1 154.531,99.1 U2.9
  Bottom Layer w0.254: R4.2 R6.2
LEDCTL: LED_CTL.1 U2.5 | length 22
  Top Layer w0.254: v1@143.45,102.275 143.45,102.15 141.835,100.535 141.835,94.84 143.775,92.9 146.755,92.9 150.5,96.645 150.5,97.593 U2.5
  Bottom Layer w0.254: v1(143.475,102.2) LED_CTL.1@143.475,103.6
M485_CTRL: U2.4 U5.2 U5.3 | length 20.3
  Top Layer w0.254: v1(148.8,96.8) 148.8,97.7 149.193,98.093 U2.4
  Bottom Layer w0.254: U5.3 146.83,86.3 146.5,86.3 ; U5.2 147.765,85.5 146.7,85.5 146.5,85.7 146.5,86.3 ; v1(148.8,96.8) 148.8,95.616 146.406,93.222 146.406,89.282 145.574,88.451 145.574,87.529 145.36,87.315 145.36,86.64 145.7,86.3 146.5,86.3
Net485A_1: 485A.1 F2.2 | length 14.9
  Bottom Layer w0.6: 485A.1 154.195,123.5 156.1,121.595 156.1,118.462 159.834,114.727 159.834,113.88 F2.2
Net485B_1: 485B.1 F1.2 | length 6.6
  Bottom Layer w0.6: 485B.1 162.224,116.576 162.224,114.619 162.846,113.997 162.846,113.868 F1.2
NetC1_1: C1.1 U1.1 | length 3.9
  Bottom Layer w0.6: C1.1 136,97.5 136.625,96.875 U1.1
NetC1_2: C1.2 D1.2 L1.1 U1.8 | length 12.3
  Top Layer w0.6: L1.1 v2@133.578,102.3
  Bottom Layer w0.6: U1.8 130.625,96.7 131.5,97.575 131.5,100.225 D1.2 131.275,100.5 133.075,102.3 v2(133.6,102.3) ; 131.5,97.5 C1.2
NetC3_1: C3.1 U4.4 | length 2.1
  Bottom Layer w0.4: U4.4 143.8,124.65 C3.1
NetC5_1: C5.1 R27.1 R.1 | length 6
  Bottom Layer w0.3: R.1 145.4,108.3 145.7,108.6 146.525,108.6 R27.1 C5.1
NetC5_2: C5.2 R10.1 | length 6.4
  Bottom Layer w0.3: R10.1 151.375,114.3 151.9,114.3 152.475,113.725 152.475,111.025 151.15,109.7 C5.2
NetC6_1: C6.1 R3.2 | length 7.4
  Bottom Layer w0.254: C6.1 137.05,118.35 137.7,119 142.875,119 R3.2
NetC6_2: C6.2 R12.1 | length 2.4
  Bottom Layer w0.254: R12.1 137.025,115.525 C6.2 C6.2@137.275,115.55
NetC9_1: C9.1 R15.2 R16.2 U3.5 | length 7.9
  Bottom Layer w0.254: U3.5 143.36,113.49 144.225,112.625 C9.1 ; R16.2 145.9,111.35 R15.2
NetC10_1: C10.1 R14.2 R15.1 U3.3 | length 6.6
  Bottom Layer w0.254: U3.3 147.615,114.76 149.425,112.95 149.425,111.425 149.4,111.4 R15.1
NetD4_2: D4.2 V-.1 | length 6.9
  Bottom Layer w0.6: D4.2 126.625,113.325 V-.1
NetD4_3: D4.3 V+.1 | length 4.6
  Bottom Layer w0.6: D4.3@126.175,107.45 126.175,103.625 V+.1@126.7,103.1
NetD5_1: D5.1 R17.2 | length 4.7
  Top Layer w0.3: D5.1 125.587,98.473 R17.2
NetD5_2: D5.2 R18.2 | length 4.3
  Top Layer w0.3: D5.2 127.2,99.371 127.586,98.985 R18.2
NetD5_3: D5.3 R31.2 | length 3.3
  Top Layer w0.3: D5.3 128.813,100.573 R31.2@129.6,99.785
NetD6_1: D6.1 R32.2 | length 4.7
  Top Layer w0.3: D6.1 136.15,86.45 R32.2
NetD6_2: D6.2 R33.2 | length 4.3
  Top Layer w0.3: D6.2 134.295,90.53 136.544,88.281 137.07,88.281 R33.2
NetD6_3: D6.3 R34.2 | length 3.2
  Top Layer w0.3: D6.3 135.824,91.726 136.7,90.85 R34.2
NetD7_1: D7.1 R35.2 | length 4.3
  Top Layer w0.3: D7.1 152.202,85.712 R35.2
NetD7_2: D7.2 R36.2 | length 3.7
  Top Layer w0.3: D7.2 150.939,87.325 R36.2
NetD7_3: D7.3 R37.2 | length 3.2
  Top Layer w0.3: D7.3 149.677,88.938 R37.2
NetD8_1: D8.1 R38.2 | length 4
  Top Layer w0.3: D8.1 163.925,95.8 R38.2
NetD8_2: D8.2 R39.2 | length 3.9
  Top Layer w0.3: D8.2 162.341,96.497 162.341,96.689 R39.2
NetD8_3: D8.3 R40.2 | length 3.4
  Top Layer w0.3: D8.3 158.949,95.849 160.2,97.1 160.2,98.03 R40.2@160.049,98.18
NetD9_1: D9.1 R41.2 | length 4.6
  Top Layer w0.3: R41.2 165.113,111.977 D9.1
NetD9_2: D9.2 R42.2 | length 4
  Top Layer w0.3: R42.2 163.5,110.589 D9.2
NetD9_3: D9.3 R43.2 | length 3.7
  Top Layer w0.3: R43.2 160.885,110.715 161.887,109.713 D9.3
NetD10_1: D10.1 R44.2 | length 4.4
  Top Layer w0.3: R44.2 154.878,123.997 157.181,121.694 157.181,121.6 D10.1
NetD10_2: D10.2 R45.2 | length 4
  Top Layer w0.3: R45.2 153.717,122.167 154.333,122.167 D10.2
NetD10_3: D10.3 R47.2 | length 3.4
  Top Layer w0.3: R47.2@152.472,119.797 152.675,120 153.671,120 154.798,118.874 D10.3
NetD11_1: D11.1 R48.2 | length 5.1
  Top Layer w0.3: R48.2 138.308,125.088 D11.1
NetD11_2: D11.2 R49.2 | length 4.2
  Top Layer w0.3: R49.2 139.845,123.475 D11.2
NetD11_3: D11.3 R50.2 | length 2.6
  Top Layer w0.4: D11.3 143.375,121.322 R50.2
NetD12_1: D12.1 R51.2 | length 4.7
  Top Layer w0.3: R51.2 126.45,114.281 D12.1
NetD12_2: D12.2 R52.2 | length 4
  Top Layer w0.3: R52.2 128.95,113.586 128.95,114.5 D12.2
NetD12_3: D12.3 R25.2 | length 3.3
  Top Layer w0.3: R25.2@130.493,112.617 130.375,112.735 130.375,113.8 131.695,115.12 D12.3
NetF1_1: F1.1 R1.1 T1.2 | length 17.5
  Bottom Layer w0.6: R1.1 160.55,97.77 T1.2 161.992,103.428 161.992,108.677 F1.1
NetF2_1: F2.1 R5.1 T2.2 | length 14.5
  Bottom Layer w0.6: R5.1 158.7,98.842 T2.2 160.9,103.52 160.9,109.1 160.3,109.7 F2.1
NetP1_3: P1.3 U2.8 | length 8.4
  Top Layer w0.2: P1.3 154.173,94.925 156.051,96.802 156.051,98.368 155.8,98.618 U2.8 U2.8@154.337,98.618
NetQ3_1: Q3.1 R4.1 | length 2.1
  Bottom Layer w0.6: Q3.1 142.8,88 R4.1
NetQ4_1: Q4.1 R19.1 | length 1.9
  Bottom Layer w0.2: R19.1 157.3,113.1 Q4.1
NetQ5_1: Q5.1 R21.1 | length 2
  Bottom Layer w0.254: Q5.1 138.35,89.25 R21.1
NetR1_2: R1.2 U5.7 | length 5.2
  Bottom Layer w0.5: U5.7@154,89.2 154.65,89.85 155.567,89.85 157.125,91.408 R1.2
NetR2_1: R2.1 R12.2 U3.6 | length 6.3
  Bottom Layer w0.254: R12.2 138.975,111.75 R2.1 139.925,112.7 139.925,113.975 140.71,114.76 U3.6
NetR2_2: R2.2 R13.1 U3.7 | length 8.6
  Mid-Layer 2 w0.254: v1(138.225,110.6) v1(138.225,112.7)
  Bottom Layer w0.254: R13.1 138.225,110.275 v1(138.225,110.6) ; v1(138.225,112.7) 138.975,113.45 R2.2 139.35,113.775 139.35,114.475 139.85,114.975 139.85,115.775 140.105,116.03 U3.7
NetR3_1: R3.1 R7.2 U3.1 | length 6.9
  Bottom Layer w0.254: R3.1 144.625,117.6 144.925,117.3 U3.1 148.325,117.3 R7.2
NetR5_2: R5.2 U5.6 | length 4.2
  Bottom Layer w0.5: U5.6 153.118,90.1 154.85,91.831 R5.2
NetR7_1: R7.1 R10.2 U3.2 | length 5.4
  Bottom Layer w0.254: U3.2 147.995,116.03 R10.2 149.475,114.6 R7.1
NetR9_1: R9.1 R11.2 U1.4 | length 4.7
  Bottom Layer w0.3: U1.4 138.965,91.59 139.375,92 R9.1
NetR26_2: R26.2 U4.3 | length 2.7
  Bottom Layer w0.3: R26.2@137.475,124.6 137.525,124.65 U4.3
RED: D5.6 D6.6 D7.6 D8.6 D9.6 D10.6 D11.6 D12.6 Q3.3 | length 132.6
  Top Layer w0.4: v1(142.6,84.8) 142.6,85.502 D7.6
  Top Layer w0.6: v1(124.3,110.2) 125.587,108.913 D5.6 ; v1(128.2,94.1) 129.226,93.074 D6.6 ; v1(131.925,119.7) 133.199,120.974 D12.6 ; D11.6@147.75,125.1 v2@149.722,125.1 ; D8.6 D8.6@157.601,89.601 ; D8.6@157.625,89.5 v1(158.325,88.8) ; D10.6@161.374,117.526 v1(163.1,115.8) ; D9.6 165.3,102.922 v1(165.3,104.5)
  Mid-Layer 2 w0.6: v1(124.3,110.2) 125.6,110.2 125.6,111.1 ; v1(131.925,119.7) 125.6,113.375 125.6,111.1 ; v1(142.6,84.8) 142.6,85.7 142.7,85.8 ; v2(149.85,125.1) 153.825,125.1 153.825,125.075 v1(163.1,115.8) ; v1(158.325,88.8) 157.6,89.525 157.6,89.6 ; 162.512,116.413 165.3,113.625 v1(165.3,104.5) 165.3,97.3 157.6,89.6 ; 125.6,111.1 125.6,96.675 136.475,85.8 142.7,85.8 ; 142.7,85.8 153.8,85.8 157.6,89.6
  Bottom Layer w0.6: v1(142.6,84.8) 143.05,84.8 Q3.3
RXD: U2.7 U5.1 | length 21.4
  Top Layer w0.2: v1(154.5,96.1) 155.597,97.197 155.597,98.003 155.507,98.093 U2.7
  Bottom Layer w0.254: U5.1 149.906,85.906 149.906,87.294 148.6,88.6 148.6,89.3 147.577,90.323 147.577,92.688 150.711,95.822 151.022,95.822 151.8,96.6 153.319,96.6 153.819,96.1 v1(154.5,96.1)
TXD: U2.6 U5.4 | length 15.6
  Top Layer w0.2: v1(154,96.9) 154.335,96.9 154.513,97.078 U2.6 U2.6@154.337,97.593
  Bottom Layer w0.254: U5.4 146.995,92.958 150.139,96.103 150.139,96.839 150.827,97.527 153.373,97.527 v1(154,96.9)
VDD_+5V: C2.1 C11.2 C13.1 L1.2 Q3.2 Q4.2 Q5.2 R6.1 R9.2 R20.1 R22.1 R26.1 U4.1 U5.8 | length 114.7
  Top Layer w0.6: v2(139.8,95.8) L1.2@139.8,99.612
  Mid-Layer 2 w0.6: v2(145.3,89.6) 138.884,89.6 137.325,91.159 v2(137.325,98.3) 137.325,103.075 133.5,106.9 133.5,115.3 139,120.8 v2(139.1,120.8) 154.225,120.8 v2@154.425,120.6
  Bottom Layer w0.3: R26.1 135.775,124.425 C13.1@137.4,122.8 ; C13.1@137.556,122.8 137.606,122.75 U4.1 ; v2(139.8,95.8) 140.743,94.857 140.743,94.107 R9.2
  Bottom Layer w0.4: C13.1@137.4,122.756 137.4,121.825 138.425,120.8 v2(139.1,120.8) ; 144.65,86.35 147.055,83.945 147.4,83.6 149.1,83.6 151.227,85.727 152.923,85.727 C11.2@153.225,85.425
  Bottom Layer w0.5: C11.2@153.225,85.425 154.096,86.296 U5.8 ; v2(154.4,120.7) 155.03,120.07 155.03,113.57 Q4.2
  Bottom Layer w0.6: Q5.2 138.35,87.35 R22.1 138.4,87 139.3,86.1 141.6,86.1 142.2,86.7 144.65,86.7 ; v2(137.325,98.3) 139.421,98.3 C2.1@139.8,97.921 ; v2(139.8,95.8) C2.1@139.8,97.921 ; C2.1 C2.1@139.8,97.921 ; 144.65,86.35 144.65,86.7 ; v2(145.3,89.6) 144.9,90 R6.1 144.6,88 Q3.2 144.65,86.7 ; Q4.2 155.5,113.1 R20.1
pads on no net: U1.5
copper on no net:
  other v3: 145.35,105.3

## Polygon pours and split planes (outlines as drawn)
AGND on Bottom Layer "GND" (solid, remove dead copper, pour order 39): 136,120.1 139.9,120.1 139.9,120.175 141.125,121.4 141.225,121.3 145.175,121.3 147.425,119.05 147.425,119 153.625,119 153.6,118.975 153.6,112.2 150.775,112.2 149.975,111.4 149.975,105.425 149.85,105.3 149.75,105.4 140.025,105.4 135.625,109.8 135.5,109.8 135.5,119.75 135.85,120.1
GND on Bottom Layer "GND" (solid, remove dead copper, pour order 41): 122.175,128.5 168.375,128.5 168.475,128.4 168.475,82.4 168.575,82.3 122.475,82.3 122.375,82.4
AGND on Mid-Layer 2 "GND" (solid, remove dead copper, pour order 38): 135.625,121.3 145.1,121.3 147.5,118.9 153.65,118.9 153.65,105.325 153.625,105.3 135.55,105.3 135.5,105.35 135.5,121.3
GND on Mid-Layer 2 "GND" (solid, remove dead copper, pour order 42): 122.575,128.1 168.475,128.1 168.475,82.3 168.575,82.2 122.675,82.2 122.575,82.3
GND on GND "GND" (solid, remove dead copper, pour order 44): 122.2,128.1 168.55,128.1 168.55,82.175 168.625,82.1 122.3,82.1 122.2,82.2
AGND on GND "GND" (solid, remove dead copper, pour order 37): 135.875,120.1 139.9,120.1 141.1,121.3 141.125,121.3 145.1,121.3 147.375,119.025 147.375,119 153.65,119 153.65,112.2 150.775,112.2 149.9,111.325 149.9,111.3 149.9,105.3 140,105.3 135.525,109.775 135.525,109.8 135.525,119.8 135.825,120.1
GND on Top Layer "GND" (solid, remove dead copper, pour order 43): 122.15,128.5 168.75,128.5 168.85,128.4 168.85,82 122.175,82 121.975,81.8
AGND on Top Layer "GND" (solid, remove dead copper, pour order 40): 136.073,120.107 140.05,120.107 140.075,120.082 141.194,121.2 145.172,121.2 147.459,118.914 153.65,118.914 153.6,118.865 153.6,112.058 150.617,112.058 150.318,111.76 149.995,111.437 149.995,106.096 149.324,105.425 149.324,105.4 140.175,105.4 135.625,109.946 135.625,109.971 135.625,119.709 136.023,120.107

## Keep-outs
Keep-Out Layer:
  circle w0.15: c153.8,105.3 r3
  circle w0.15: c145.4,96.7 r2.5
  lines w0.2: 122.647,103.829 ccw(c145.399,105.308) 122.85,101.934 ccw(c123.344,102.008) 123.344,101.508 123.932,101.508 ccw(c145.399,105.308) 124.499,99.108 124.129,99.108 ccw(c124.129,98.608) 123.652,98.458 ccw(c145.399,105.308) 143.919,82.556 cw(c145.399,82.308) 146.878,82.556 ccw(c145.399,105.308) 167.145,98.458 ccw(c166.668,98.608) 166.668,99.108 166.298,99.108 ccw(c145.399,105.308) 166.865,101.508 167.453,101.508 ccw(c167.453,102.008) 167.948,101.934 ccw(c145.399,105.308) 168.151,103.829 cw(c168.399,105.308) 168.151,106.787 ccw(c145.399,105.308) 146.878,128.06 cw(c145.399,128.308) 143.919,128.06 ccw(c145.399,105.308) 122.647,106.787 cw(c122.399,105.308) 122.647,103.829

## Other copper
Top Layer:
  pour cut-out: 153.775,112.2 153.775,108.575 153.85,108.5 153.225,108.5 153.25,108.525 153.25,112.2
  pour cut-out: 148.075,105.9 148.39,105.9 148.39,105.015 148.075,104.7 142.26,104.7 142.26,105.9
GND:
  pour cut-out: 142.825,105.9 147.9,105.9 147.9,104.7 142.825,104.7
Mid-Layer 2:
  pour cut-out: 157.55,113.824 156.822,114.089 157.01,114.606 157.074,114.635 157.134,114.507 157.745,114.285 158.071,113.958
  pour cut-out: 136.275,107.3 136.275,108.075 136.825,108.075 136.875,108.025 136.775,107.925 136.775,107.275
  pour cut-out: 132.419,118.691 132.032,119.362 132.508,119.637 132.576,119.619 132.54,119.482 132.865,118.919
  pour cut-out: 144.975,86.013 144.975,86.787 145.525,86.787 145.575,86.737 145.475,86.638 145.475,85.987
  pour cut-out: 148.1,105.9 148.1,104.7 142.65,104.7 142.65,105.9
Bottom Layer:
  pour cut-out: 157.519,95.357 157.952,96.546 157.933,96.586 159.182,96.132 159.201,96.092 158.757,94.873
  pour cut-out: 135.55,105.736 135.55,108.75 135.65,108.85 136.325,108.85 136.35,108.825 136.35,105.85 136.45,105.75 135.65,105.75
  pour cut-out: 137.436,105.3 140.45,105.3 140.55,105.2 140.55,104.525 140.525,104.5 137.55,104.5 137.45,104.4 137.45,105.2
  pour cut-out: 145.65,122 147.625,122 147.625,121.6 145.65,121.6
  pour cut-out: 142.825,108 147.975,108 147.975,104.8 148.075,104.7 142.85,104.7
  pour cut-out: 133.6,109.5 133.6,106.55 133.65,106.5 128.925,106.5 128.8,106.625 128.8,109.5
  pour cut-out: 144.15,105.1 146.5,105.1 146.5,102.425 146.475,102.4 144.225,102.4
  pour cut-out: 148.075,105.9 148.075,104.7 142.65,104.7 142.65,105.9
  pour cut-out: 135.325,95.3 138.725,95.3 138.725,92.2 135.325,92.2
  pour cut-out: 128.875,93.7 131.925,93.7 131.925,92.2 128.875,92.2

## Silkscreen, mask and mechanical layers (free items; w line width, h text height)
Top Overlay:
  text "20160921" at 138.835,115.095 h1.5
  text "800U" at 137.403,113.351 h1.5
  text "R3N3 IB_LED" at 141.139,112.573 h1.5
  text "_V1.0" at 145.435,110.923 h1.5
Bottom Overlay:
  lines w0.1: 133.025,114.6 133.025,110.863 140.025,110.863 140.025,114.6
  lines w0.15: 133.025,117.5 133.025,114.6 140.025,114.6 140.025,118.1 136.35,118.1 135.75,117.5 133.05,117.5 ; 148.5,108.8 145.075,108.8 145.075,112.3 148.55,112.3 148.55,108.8 148.55,108.75 149.9,107.4 149.9,104.3 ; 137.125,91.1 137.125,91.1 ; 148.125,101.35 148.125,104.3 151.3,104.3 151.3,101.35 148.125,101.35
Mechanical 1:
  circle w0.2: c145.399,83.808 r0.001
  circle w0.15: c153.8,105.3 r3
  circle w0.15: c145.4,96.7 r2.5
  lines w0.005: -0.127,0.508 -0.127,210.508 296.873,210.508 296.873,0.508 -0.127,0.508
  lines w0.2: 143.891,128 ccw(c145.371,128.248) 146.85,128 ; 143.919,128.06 ccw(c145.399,105.308) 122.647,106.787 cw(c122.399,105.308) 122.647,103.829 ccw(c145.399,105.308) 122.85,101.934 ccw(c123.344,102.008) 123.344,101.508 123.932,101.508 ccw(c145.399,105.308) 124.499,99.108 124.129,99.108 ccw(c124.129,98.608) 123.652,98.458 ccw(c145.399,105.308) 143.919,82.556 cw(c145.399,82.308) 146.878,82.556 ccw(c145.399,105.308) 167.145,98.458 ccw(c166.668,98.608) 166.668,99.108 166.298,99.108 ccw(c145.399,105.308) 166.865,101.508 167.453,101.508 ccw(c167.453,102.008) 167.948,101.934 ccw(c145.399,105.308) 168.151,103.829 cw(c168.399,105.308) 168.151,106.787 ccw(c145.399,105.308) 146.878,128.06 ; 142.3,104.7 148.4,104.7 148.4,105.9 142.3,105.9 142.3,104.7
Mechanical 3:
  circle w0.1: c145.399,105.308 r21.5
  circle w0.15: c212.915,114.19 r2.5
  circle w0.15: c213.025,97.09 r2.5
  circle w0.15: c204.695,105.62 r2.5
  circle w0.15: c221.365,105.58 r2.5
  lines w0.2: 121.125,105.3 172.925,105.3 ; 127.052,123.654 163.68,87.026 ; 127.426,87.345 164.054,123.973 ; 145.4,79.075 145.4,129.15 ; 142.825,104.7 147.9,104.7 147.9,105.9 142.825,105.9 142.825,104.7
Mechanical 5:
  lines w0.15: 145.075,121.3 147.425,118.95 153.6,118.95 153.625,118.925 153.625,112.2
  lines w0.2: 145.075,121.3 141.125,121.3 139.925,120.1 135.875,120.1 135.525,119.75 135.525,109.8 140.025,105.3 149.9,105.3 149.9,111.3 150.8,112.2 153.625,112.2

## Text inside footprints (layer, text, board x,y; h text height)
CT1: Top Overlay "+" at 136.301,105.951 h1.5 r120